# EAGLE board uSD_to_ICSP_v1 (EAGLE 9.5.1)
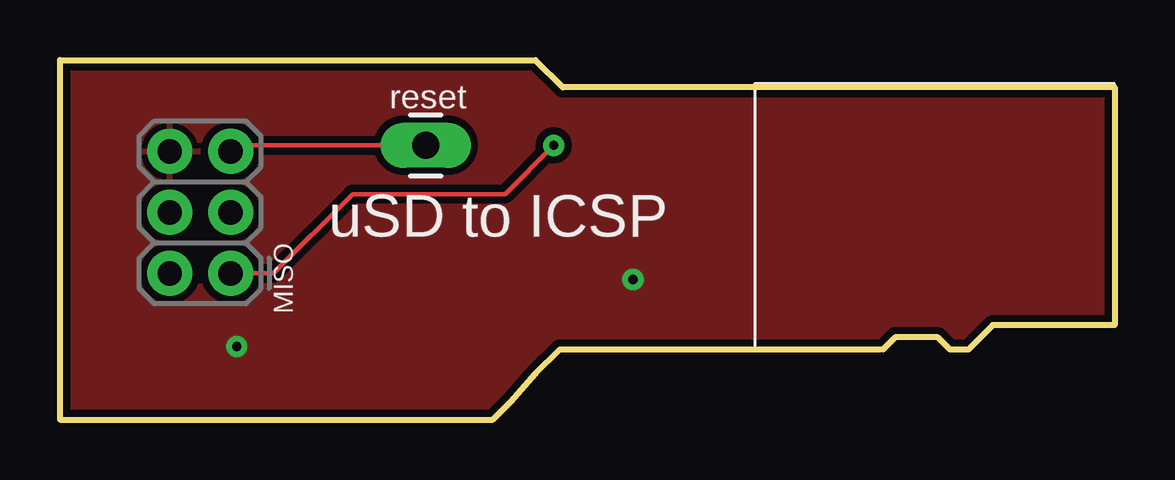
[diagram p0: board, top side]
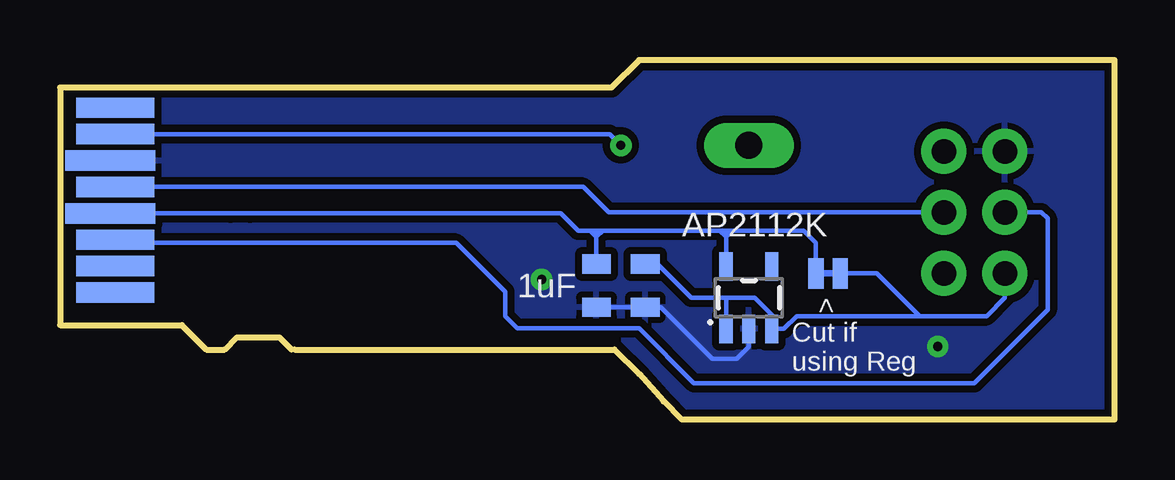
[diagram p1: board, bottom side, seen from below]

Size 43.94 x 14.99 mm. Coordinates in mm from the lower left corner, seen from the top.
Outline: 34.29,2.92 34.8,3.43 36.58,3.43 37.08,2.92 37.85,2.92 38.86,3.94 43.94,3.94 43.94,13.84 20.95,13.84 19.81,14.99 0,14.99 0,0 18.03,0 18.8,0.76 19.81,1.91 20.83,2.92 34.16,2.92
Copper layers (1*16): Top 0.035mm / dielectric 1.5mm / Bottom 0.035mm
Design rules "SparkFun-2-layer": minimum track width 7mil, minimum drill 15mil, track to track 8mil, track to pad 8mil, pad to pad 8mil, via to via 8mil, smd to smd 8mil, copper to edge 8mil, drill to drill 8mil, minimum pad ring 12mil, minimum via ring 10mil, stop-mask expansion 4mil, vias tented up to drill 20mil, thermal gap 10mil
Net classes: 0 default: clearance 0.205 mm

## Footprints (pad centres in the part's own frame; a part is rotated, then mirrored left to right if it is on the bottom)
0805 = smd 0.8 x 1.2: 1 -0.9,0; 2 0.9,0
2X3-NS = drill 1.016 pad 1.88: 1 -2.54,-1.27; 2 -2.54,1.27; 3 0,-1.27; 4 0,1.27; 5 2.54,-1.27; 6 2.54,1.27
1X01_LONGPAD = drill 1.118 pad 1.88 long: 1 0,0
SMT-JUMPER_2_NC_TRACE_NO-SILK = smd 0.635 x 1.27: 1 -0.508,0; 2 0.508,0
MICRO-SDCARD = smd 0.85 x 3.25 bottom: CD/DAT3 2.56,2.3; CLK 5.86,2.3; CMD 3.66,2.3; DAT0 8.06,2.3; DAT1 9.16,2.3; DAT2 1.46,2.3 | smd 0.85 x 3.75 bottom: GND 6.96,2.1; VCC 4.76,2.1
SOT23-5 = smd 0.55 x 1.2: 1 -0.95,-1.3; 2 0,-1.3; 3 0.95,-1.3; 4 0.95,1.3; 5 -0.95,1.3

## Placement (x,y rotation side)
C1  1.0uF  [0805]  19.56,5.59 90 bottom
C2  1.0uF  [0805]  21.59,5.59 90 bottom
FRAME1  [CREATIVE_COMMONS]  -9.89,-18.03 0 top  (outside the outline)
J1  [2X3-NS]  5.84,8.64 90 top
J2  [1X01_LONGPAD]  15.24,11.43 90 top
JP1  JUMPER-SMT_2_NC_TRACE_NO-SILK  [SMT-JUMPER_2_NC_TRACE_NO-SILK]  11.94,6.1 180 bottom
U1  MICRO-SDCARD  [MICRO-SDCARD]  43.94,3.84 90 top
U2  AP2112K  [SOT23-5]  15.24,5.08 0 bottom

## Library data of the parts
C1 C2 = SparkFun-Capacitors; PROD_ID: CAP-08064
FRAME1 = SparkFun-Aesthetics; DESIGNER: NAME; VERSION: v01
J1 J2 = SparkFun-Connectors
JP1 = SparkFun-Jumpers
U1 = SparkFun-Boards
U2 = SparkFun-IC-Power; PROD_ID: VREG-12457

## Nets
CD/DAT3: U1.CD/DAT3
GND: C1.1 C2.1 J1.6 U1.GND U2.2
IN: C1.2 J1.2 JP1.1 U2.1 U2.3
MISO: J1.1 U1.DAT0
MOSI: J1.4 U1.CMD
RESET: J1.5 J2.1
SCK: J1.3 U1.CLK
VCC: C2.2 JP1.2 U1.VCC U2.5

## Tracks (layer width: path | path; a pad name or v marks a point on that pad's centre or on a via)
GND  (via drill 0.38)
  Bottom 0.178: U2.2 15.24,3.05 15.75,2.54 16.76,2.54 18.91,4.69 C1.1 C2.1
  other vias: 7.37,3.05 23.88,5.84
  pour Top (isolate 0.305): 20.83,2.92 19.81,1.91 19.81,-2.79 -3.05,-2.79 -3.05,16.76 19.81,16.76 19.81,14.99 20.95,13.84 43.94,13.84 43.94,3.94 38.73,3.94 37.85,3.05 36.96,3.05 36.45,3.56 34.92,3.56 34.29,2.92
  pour Bottom (isolate 0.305): 43.94,13.84 20.95,13.84 19.81,14.99 19.81,16.76 -3.05,16.76 -3.05,-2.79 19.81,-2.79 19.81,1.91 19.94,2.03 20.92,2.92 34.42,2.92 34.8,3.3 36.32,3.3 36.96,2.92 37.97,2.92 38.86,3.81 43.81,3.94
IN
  Bottom 0.178: JP1.1 9.91,6.1 8.13,4.32 | J1.2 4.57,5.08 5.33,4.32 8.13,4.32 | U2.1 16.19,5.08 | C1.2 19.05,6.49 17.64,5.08 16.19,5.08 | 16.19,5.08 14.99,5.08 14.22,4.32 14.29,4.32 U2.3 13.78,3.78 13.24,4.32 8.13,4.32
MISO  (via drill 0.38)
  Top 0.178: J1.1 8.89,6.1 12.19,9.4 18.54,9.4 v20.57,11.43
  Bottom 0.178: v20.57,11.43 21.04,11.89 U1.DAT0
MOSI
  Bottom 0.178: J1.4 3.05,8.64 2.79,8.38 2.79,4.57 5.84,1.52 17.53,1.52 19.81,3.81 24.89,3.81 25.4,4.32 25.4,5.33 27.43,7.37 41.51,7.37 U1.CMD
RESET
  Top 0.178: J1.5 7.37,11.43 J2.1
SCK
  Bottom 0.178: J1.3 21.08,8.64 22.14,9.7 U1.CLK
VCC
  Bottom 0.178: JP1.2 12.45,7.37 12.95,7.87 16,7.87 | U1.VCC 36.83,8.6 36.03,8.6 23.07,8.6 22.35,7.87 21.84,7.87 | 16.19,7.87 16.44,7.87 | 16.44,7.87 21.34,7.87 | 21.34,7.87 21.59,7.87 | 21.59,7.87 21.84,7.87 | U2.5 16.19,7.62 | 16.19,7.87 16.19,7.62 | C2.2 21.59,7.62 | 21.59,7.62 21.59,7.87 | 16,7.87 16.19,7.87 | 16.19,7.62 16.44,7.87 | 16.19,7.62 16,7.81 16,7.87 | 21.59,7.62 21.34,7.87 | 21.59,7.62 21.84,7.87

## Text on the board
tNames: reset | uSD to ICSP | MISO
bNames: AP2112K | > | 1uF | Cut if / using Reg
tDocu: PCB must be no thicker than 0.75mm | Tim Holmberg | Revised by: Patrick Alberts